# Altium PCB Final_1_Board.PcbDoc
Units mm, origin at the board's own origin, x right, y up, seen from the top; angles counter-clockwise.
Board outline 23.19 x 24.99 mm, 2 copper layers (Top Layer, Bottom Layer), stack 1.671 mm thick; 29 components, 55 nets, 125 pads, 50 vias.
Unrouted connection lines stored in the file: 1.
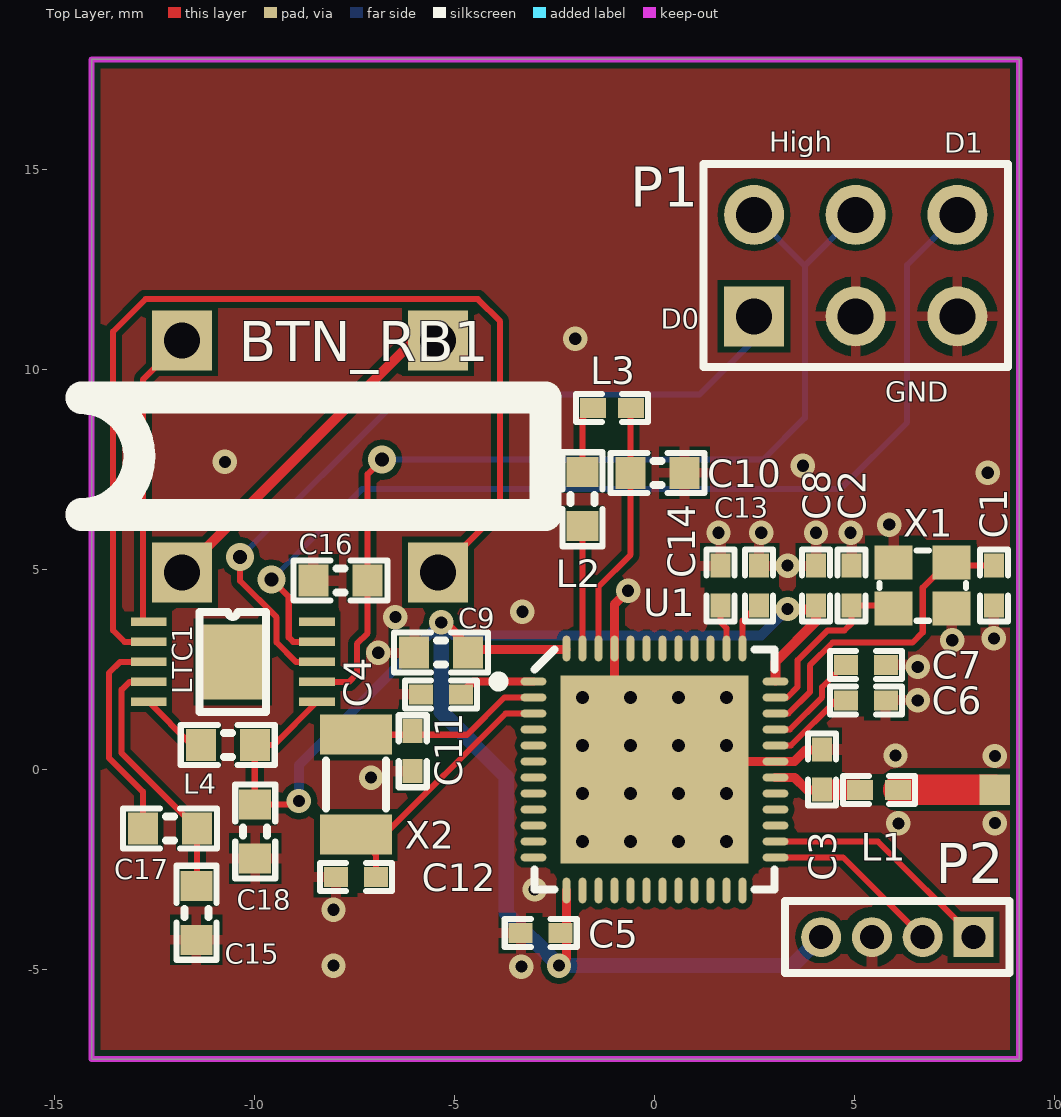
[diagram p0: Top Layer view]
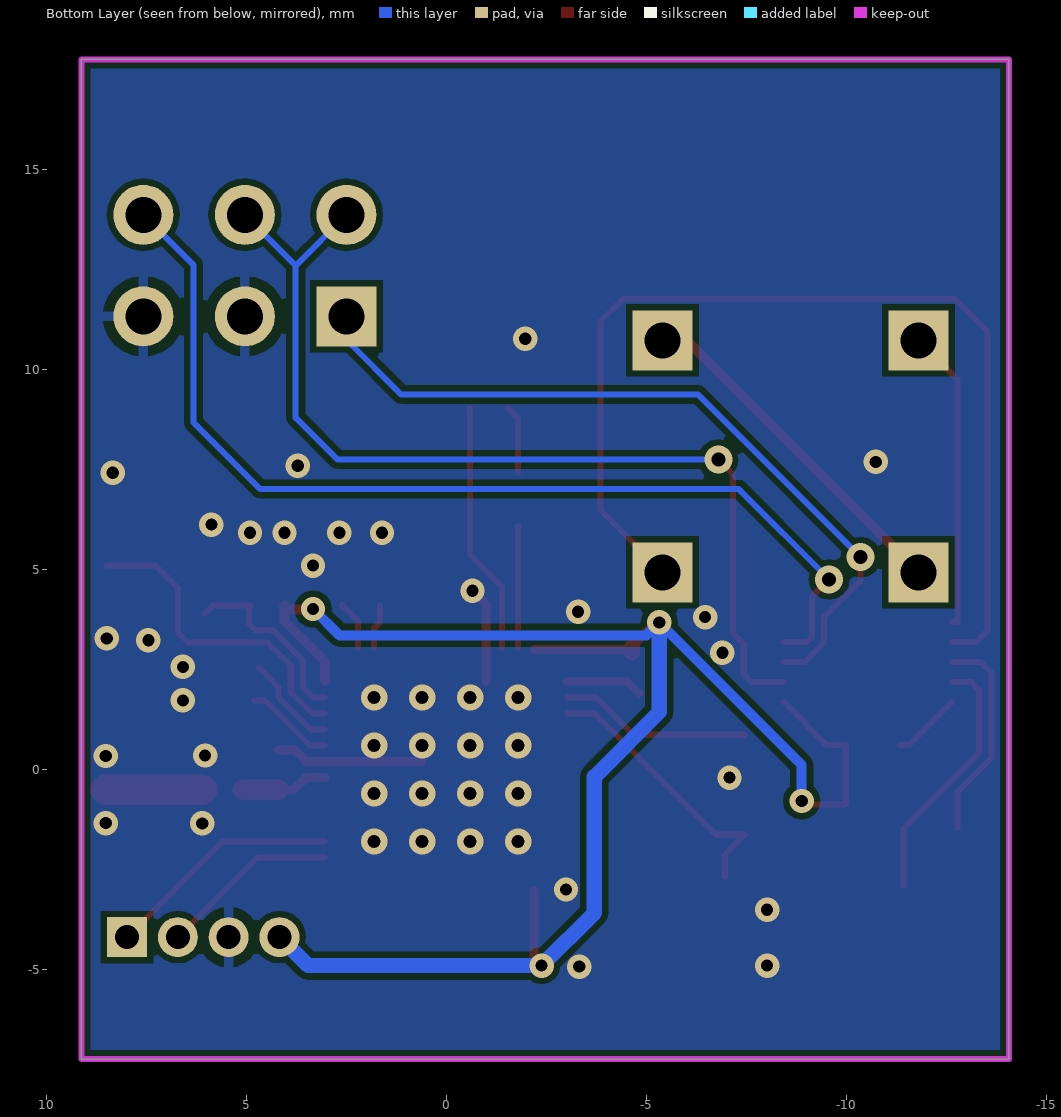
[diagram p1: Bottom Layer view, seen from below]
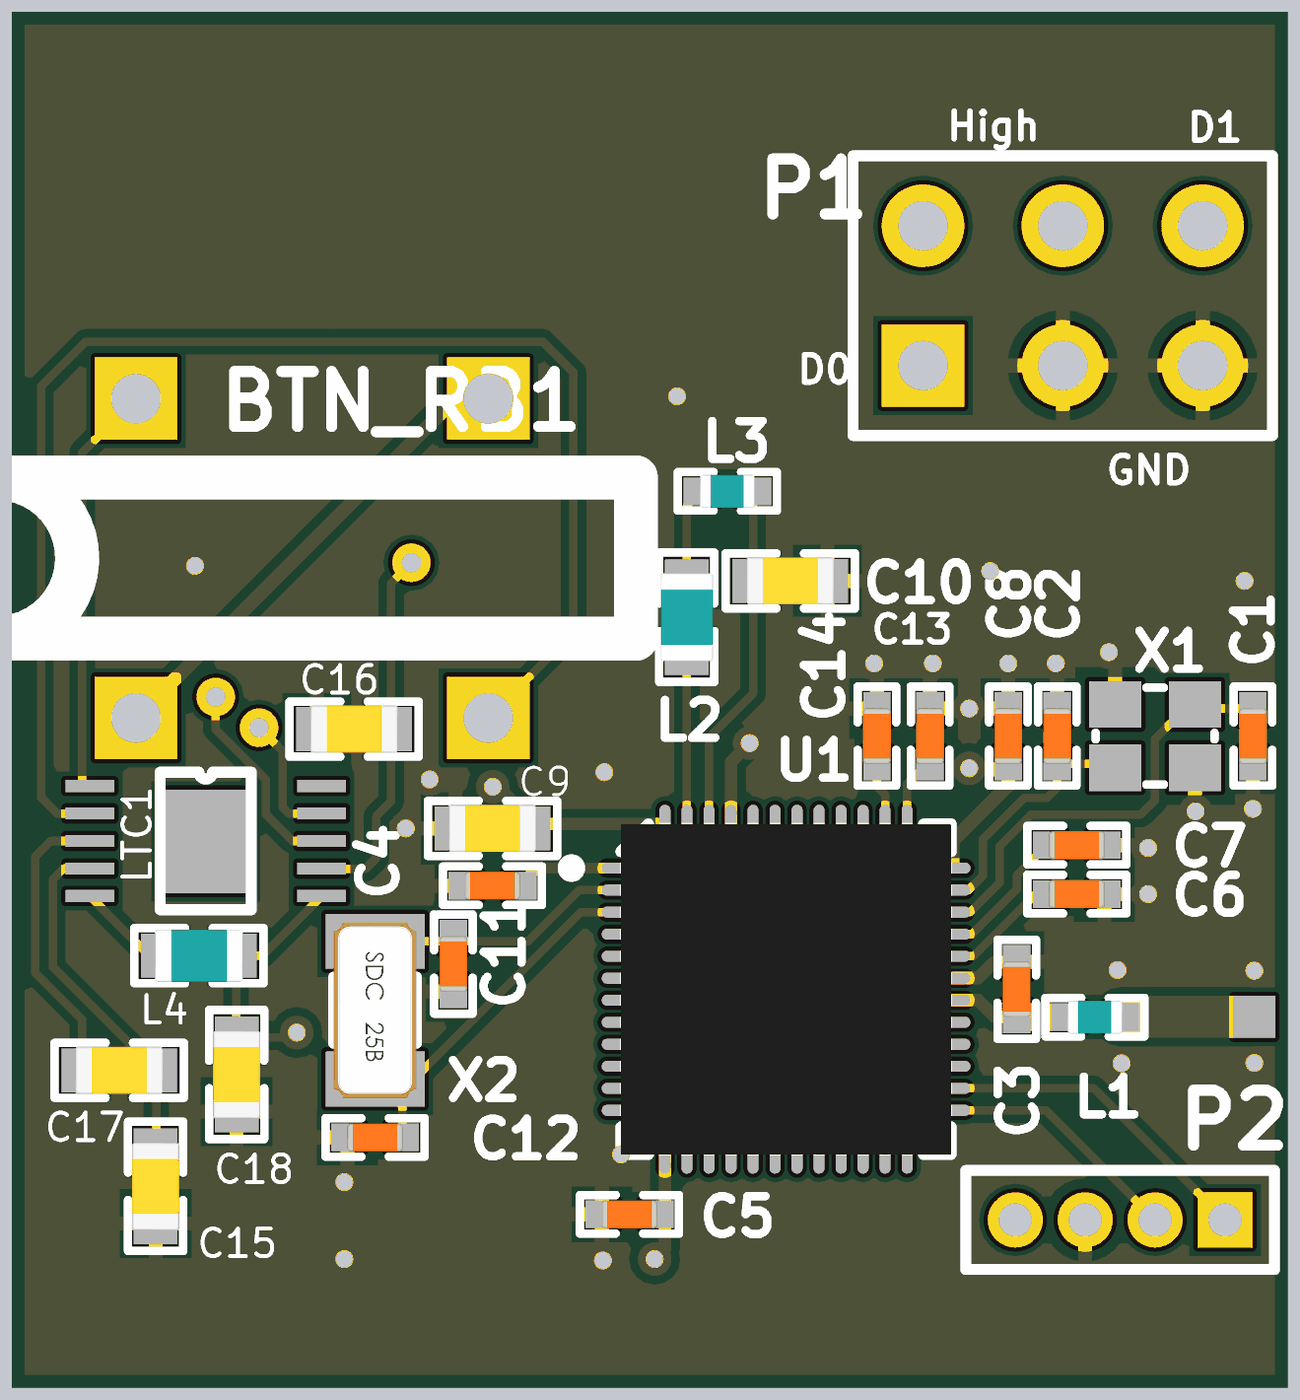
[diagram p2: 3D render of the assembled board from above, using the file's embedded part models]

## Layer stack, top to bottom
Top Solder: solder mask 0.0102, Solder Resist, Dk 3.5
Top Layer: signal copper 0.0356
Dielectric1: core 1.6002, FR-4, Dk 4.8
Bottom Layer: signal copper 0.0356
Bottom Solder: solder mask 0.0102, Solder Resist, Dk 3.5

## Board outline
-14.072,-7.239 -14.072,17.755 9.119,17.755 9.119,-7.239

## Design rules (kind name [scope] priority, off if disabled: settings)
Clearance Polygon_ANT [(InNamedPolygon('Top_Layer-GND')) or (InNamedPolygon('Bottom_Layer-GND')) vs InNet('RF')] p1: gap=0.127 ignorepadtopadclearanceinfootprint=FALSE except(0: Arc-Hole Track-Hole SMDPad-Hole THPad-Hole Via-Hole Fill-Hole Poly-Hole Region-Hole Text-Hole)
Clearance Polygon [(InNamedPolygon('Top_Layer-GND')) or (InNamedPolygon('Bottom_Layer-GND'))] p2: gap=0.254 ignorepadtopadclearanceinfootprint=FALSE except(0: Arc-Hole Track-Hole SMDPad-Hole THPad-Hole Via-Hole Fill-Hole Poly-Hole Region-Hole Text-Hole)
Clearance [All] p3: gap=0.152 ignorepadtopadclearanceinfootprint=FALSE except(0: Arc-Hole Track-Hole SMDPad-Hole THPad-Hole Via-Hole Fill-Hole Poly-Hole Region-Hole Text-Hole)
ComponentClearance [All] p1 off: gap=0.254 collisioncheckmode=3 verticalgap=0.254 showdistances=FALSE
FabricationTestPointUsage TestPointUsage [All] p1: valid=0 allowmultiple=FALSE
FabricationTestpoint Testpoint [All] p1: side=3 testpointundercomponent=TRUE minsize=1.016 maxsize=2.54 preferedsize=1.524 minholesize=0 maxholesize=1.016 preferedholesize=0.813 testpointgrid=0.025 allowsidetop=TRUE allowsidebottom=TRUE usegrid=TRUE gridtolerance=0
Height [All] p1 off: minheight=0 maxheight=25.4 prefheight=12.7
HoleSize [All] p1: absolutevalues=TRUE maxlimit=4.064 minlimit=0.305 maxpercent=80.000 minpercent=20.000
MinimumAnnularRing [All] p1 off: minimumring=0.152
PolygonConnect PolygonConnect_1 [isVia and innet(gnd)] p1: connectstyle=Direct reliefconductorwidth=0.254 reliefentries=4 polygonreliefangle="90 Angle" airgapwidth=0.254
PolygonConnect [All] p2: connectstyle=Relief reliefconductorwidth=0.254 reliefentries=4 polygonreliefangle="90 Angle" airgapwidth=0.254
RoutingVias [All] p1: holewidth=0.406 width=0.813 viastyle="Through Hole" minholewidth=0.254 minwidth=0.254 maxholewidth=0.711 maxwidth=1.27
SilkToSolderMaskClearance SilkscreenOverComponentPads [IsPad] p1: minsilkscreentomaskgap=0.254 clearancetoexposedcopper=TRUE
SolderMaskExpansion [All] p1: expansion=0.076
Width [All] p1: maxlimit=2.54 minlimit=0.152 preferedwidth=0.152
24 further rules are at their usual default settings.

## Components (designator, comment, footprint, x,y, rotation, side; value= is the part's Value field where it differs from the comment)
BTN_RB1 "ZF_button" ZF-button -11.811,10.728 r0 top
C1 "12pF" CAPC1005X04L 8.483,4.598 r270 top
C2 "12pF" CAPC1005X04L 4.927,4.598 r90 top
C3 "0.8pF" CAPC1005X04L 4.191,0 r270 top
C4 "100nF" CAPC1005X04L -5.334,1.88 r180 top
C5 "100nF" CAPC1005X04L -2.845,-4.089 r180 top
C6 "N.C." CAPC1005X04L 5.283,1.727 r180 top
C7 "100pF" CAPC1005X04L 5.283,2.616 r0 top
C8 "100nF" CAPC1005X04L 4.038,4.598 r90 top
C9 "4.7µF" CAPC1608X06L -5.334,2.921 r180 top
C10 "1.0µF" CAPC1608X06L 0.076,7.417 r180 top
C11 "12pF" CAPC1005X04L -6.045,0.457 r270 top
C12 "12pF" CAPC1005X04L -7.468,-2.692 r180 top
C13 "12pF" CAPC1005X04L 2.616,4.598 r90 top
C14 "12pF" CAPC1005X04L 1.651,4.598 r90 top
C15 "10µF" CAPC1608X06L -11.455,-3.581 r90 top
C16 "4.7µF" CAPC1608X06L -7.849,4.724 r0 top
C17 "1µF" CAPC1608X06L -12.116,-1.473 r0 top
C18 "47µF" CAPC1608X06L -9.982,-1.549 r90 top
L1 "3.9nH" INDC1005X04L 5.613,-0.508 r0 top
L2 "10µH" INDC1608X06L -1.803,6.756 r270 top
L3 "15nH" INDC1005X04L -1.067,9.042 r180 top
L4 "10µH" INDC1608X06L -10.668,0.61 r0 top
LTC1 "2x5 Pin" "MSOP10 - duplicate1" -12.649,3.692 r0 top
P1 "Header 3X2" HDR2X3 2.489,11.328 r0 top
P2 "MHDR1X4" MHDR1X4 7.976,-4.191 r180 top
U1 "nRF52832-QFAA" QFN40P600X600X90-48N 0,0 r0 top locked
X1 "32MHz" BT-XTAL_2016 6.705,4.598 r180 top
X2 "32.768kHz" XTAL_3215 -7.468,-0.381 r270 top

## Footprints (in the part's own frame and the unit in brackets; to place one, negate y for a bottom-side part, rotate by r counter-clockwise, add the part's x,y. Pads: shape width x height; smd on the part's side, far side on the other; paste and mask are expansions set on the pad)
BT-XTAL_2016 [mm] "Crystal 2.0 x 1.6 mm"
  rect 0.95x0.85 smd: 1(-0.725,-0.575) 2(0.725,-0.575) 3(0.725,0.575) 4(-0.725,0.575)
  silkscreen extent -1.08,-0.88 1.08,0.88
CAPC1005X04L [mm] "Chip Capacitor, 2-Leads, Body 1.0x0.5mm, IPC High Density"
  rect 0.6x0.5 smd: 1(-0.5,0) 2(0.5,0)
  silkscreen extent -0.9,-0.35 0.9,0.35, body extent -0.51,-0.25 0.51,0.25, height 0.5
CAPC1608X06L [mm] "Chip Capacitor, 2-Leads, Body 1.6x0.8mm, IPC High Density"
  rect 0.75x0.8 smd: 1(-0.675,0) 2(0.675,0)
  silkscreen extent -1.17,-0.5 1.17,0.5, body extent -0.8,-0.43 0.8,0.43, height 0.8
HDR2X3 [mm] "Connector; Header; 3x2 Position"
  rect 1.5x1.5 hole 0.9: 1(0,0)
  round 1.5 hole 0.9: 2(0,2.54) 3(2.54,0) 4(2.54,2.54) 5(5.08,0) 6(5.08,2.54)
  silkscreen extent -1.27,-1.27 6.35,3.81
INDC1005X04L [mm] "Chip Inductor, 2-Leads, Body 1.0x0.5mm, IPC High Density"
  rect 0.65x0.5 smd: 1(-0.475,0) 2(0.475,0)
  silkscreen extent -0.9,-0.35 0.9,0.35, body extent -0.5,-0.3 0.5,0.3, height 0.5
INDC1608X06L [mm] "Chip Inductor, 2-Leads, Body 1.6x0.8mm, IPC High Density"
  rect 0.75x0.8 smd: 1(-0.675,0) 2(0.675,0)
  silkscreen extent -1.18,-0.5 1.17,0.5, body extent -0.8,-0.48 0.8,0.48, height 0.8
MHDR1X4 [mm] "Connector; Header; 4 Position"
  rect 1x1 hole 0.6: 1(0,0)
  round 1 hole 0.6: 2(1.27,0) 3(2.54,0) 4(3.81,0)
  silkscreen extent -0.9,-0.9 4.71,0.9
"MSOP10 - duplicate1" [mm]
  rect 0.889x0.22 smd: 1(0,0) 2(0,-0.5) 3(0,-1) 4(0,-1.5) 5(0,-2) 6(4.211,-2) 7(4.211,-1.5) 8(4.211,-1) 9(4.211,-0.5) 10(4.211,0)
  rect 1.68x1.88 smd: 11(2.105,-1.006)
  silkscreen extent 1.28,-2.25 2.93,0.25
QFN40P600X600X90-48N [mm] "QFN, 48-Leads, Body 6,0x6,0mm (max), Pitch 0,40mm, IPC Medium Density"
  oval 0.65x0.2 smd: 1(-3.025,2.2) 2(-3.025,1.8) 3(-3.025,1.4) 4(-3.025,1) 5(-3.025,0.6) 6(-3.025,0.2) 7(-3.025,-0.2) 8(-3.025,-0.6) 9(-3.025,-1) 10(-3.025,-1.4) 11(-3.025,-1.8) 12(-3.025,-2.2) 25(3.025,-2.2) 26(3.025,-1.8) 27(3.025,-1.4) 28(3.025,-1) 29(3.025,-0.6) 30(3.025,-0.2) 31(3.025,0.2) 32(3.025,0.6) 33(3.025,1) 34(3.025,1.4) 35(3.025,1.8) 36(3.025,2.2)
  oval 0.2x0.65 smd: 13(-2.2,-3.025) 14(-1.8,-3.025) 15(-1.4,-3.025) 16(-1,-3.025) 17(-0.6,-3.025) 18(-0.2,-3.025) 19(0.2,-3.025) 20(0.6,-3.025) 21(1,-3.025) 22(1.4,-3.025) 23(1.8,-3.025) 24(2.2,-3.025) 37(2.2,3.025) 38(1.8,3.025) 39(1.4,3.025) 40(1,3.025) 41(0.6,3.025) 42(0.2,3.025) 43(-0.2,3.025) 44(-0.6,3.025) 45(-1,3.025) 46(-1.4,3.025) 47(-1.8,3.025) 48(-2.2,3.025)
  rect 4.7x4.7 smd: 49(0,0)
  silkscreen extent -4.02,-3 3,3, body extent -3.02,-3.02 3.02,3.02, height 0.86
XTAL_3215 [mm] "XTAL SMD 3.2 x 1.5 mm"
  rect 1x1.8 smd: 1(-1.25,0) 2(1.25,0)
  silkscreen extent -0.6,-0.75 0.6,0.75, body extent -1.6,-0.75 1.6,0.75, height 0.81
ZF-button [mm]
  rect 1.5x1.5 hole 0.9: 1(0,0) 2(0,-5.8) 3(6.4,-5.8) 4(6.4,0)
  silkscreen extent -2.52,-4.36 9.08,-1.43

## Part data
C1 C2 C11 C12 C13 C14: library part C0402-12p, "Capacitor, NP0, ±2%", Artikkelnr Noca=20029159, Artikkelnr Simpro=N.A., Footprint Doc=0402, LatestRevisionDate=2011-05-11, Note=50V, Part Number=C0402-12p, Pin Count=2, Published=2009-05-08, Publisher="Nordic Semiconductor"
C3: library part C0402-0.8p, "Capacitor, NP0, ±5%", Artikkelnr Noca=20029147, Artikkelnr Simpro=N.A., Footprint Doc=0402, LatestRevisionDate=2012-11-21, Note=50V, Part Number=C0402-0.8p, Pin Count=2, Published=2009-05-08, Publisher="Nordic Semiconductor"
C4 C5 C8: library part C0402-100n, "Capacitor, X7R, ±10%", Artikkelnr Noca=20039200, Artikkelnr Simpro=N.A., Footprint Doc=0402, LatestRevisionDate=2009-11-23, Note=16V, Part Number=C0402-100n, Pin Count=2, Published=2009-05-08, Publisher="Nordic Semiconductor"
C6: library part C0402-N.C., "Not mounted", Artikkelnr Noca=N.A., Artikkelnr Simpro=N.A., Footprint Doc=0402, LatestRevisionDate=2009-05-08, Note="Chip Cap", Part Number=C0402-N.C., Pin Count=2, Published=2009-05-08, Publisher="Nordic Semiconductor"
C7: library part C0402-100p, "Capacitor, NP0, ±5%", Artikkelnr Noca=20029135, Artikkelnr Simpro=N.A., Footprint Doc=0402, LatestRevisionDate=2009-05-08, Note=50V, Part Number=C0402-100p, Pin Count=2, Published=2009-05-08, Publisher="Nordic Semiconductor"
C9: library part C0603-4µ7, "Capacitor, X5R, ±10%", Artikkelnr Noca=20069060, Artikkelnr Simpro=N.A., Footprint Doc=0603, LatestRevisionDate=2009-11-23, Note=6.3V, Part Number=C0603-4µ7, Pin Count=2, Published=2009-05-08, Publisher="Nordic Semiconductor"
C10: library part C0603-1µ0, "Capacitor, X7R, ±10%", Artikkelnr Noca=20039335, Artikkelnr Simpro=N.A., Footprint Doc=0603, LatestRevisionDate=2013-06-05, Note=16V, Part Number=C0603-1µ0, Pin Count=2, Published=2009-05-08, Publisher="Nordic Semiconductor"
C15 C16 C17 C18: "Capacitor, X5R, ±10%", Part Number=C0603-4µ7, Artikkelnr Noca=20069060, Artikkelnr Simpro=N.A., Footprint Doc=0603, LatestRevisionDate=2009-11-23, Note=6.3V, Pin Count=2, Published=2009-05-08, Publisher="Nordic Semiconductor"
L1: library part L0402-3n9, "High frequency chip inductor ±5%", Manufacturer=Murata, Manufacturer Part Number=LQP15MN3N9B02D, Supplier part number=490-1131-1-ND, Artikkelnr Noca=33029151, Artikkelnr Simpro=N.A., Datasheet=http://search.murata.co.jp/Ceramy/image/img/PDF/ENG/L0075S0084LQP15M.pdf, Footprint Doc=0402, LatestRevisionDate=2012-09-19, Note="High frequency chip inductor ±5%", Part Number=L0402-3n9, Pin Count=2, Published=2009-05-08, Publisher="Nordic Semiconductor", Supplier=Digi-Key
L2: library part L0603-10µ, "Chip inductor, IDC,min = 50 mA, ±20%", 2nd source part number=178-6105, Manufacturer="Taiyo Yuden", Manufacturer Part Number=LBMF1608T100K, Supplier part number=587-1714-1-ND, 2nd source Supplier=Farnell, Artikkelnr Noca=33029314, Artikkelnr Simpro=N.A., Datasheet=http://www.yuden.co.jp/ut/product/pdf/elb2_e.pdf, Footprint Doc=0603, LatestRevisionDate=2012-09-19, Note="LBMF1608T100K 10µH 80mA 0603", Part Number=L0603-10µ, Pin Count=2, Published=2010-02-24, Publisher="Nordic Semiconductor", Supplier=Digi-Key
L3: library part L0402-15n, "High frequency chip inductor ±10%", 2nd source part number=658-1328, Manufacturer="Taiyo Yuden", Manufacturer Part Number=HK100515NJ-T, Supplier part number=587-1521-1-ND, 2nd source Supplier=Farnell, Artikkelnr Noca=33029323, Artikkelnr Simpro=N.A., Datasheet=http://www.yuden.co.jp/productdata/catalog/en/mlci04_e.pdf, Footprint Doc=0402, LatestRevisionDate=2012-09-19, Note="High frequency chip inductor ±10%", Part Number=L0402-15n, Pin Count=2, Published=2010-07-12, Publisher="Nordic Semiconductor", Supplier=Digi-Key
L4: "Chip inductor, IDC,min = 50 mA, ±20%", 2nd source part number=178-6105, Manufacturer="Taiyo Yuden", Manufacturer Part Number=LBMF1608T100K, Part Number=L0603-10µ, Supplier part number=587-1714-1-ND, 2nd source Supplier=Farnell, Artikkelnr Noca=33029314, Artikkelnr Simpro=N.A., Datasheet=http://www.yuden.co.jp/ut/product/pdf/elb2_e.pdf, Footprint Doc=0603, LatestRevisionDate=2012-09-19, Note="LBMF1608T100K 10µH 80mA 0603", Pin Count=2, Published=2010-02-24, Publisher="Nordic Semiconductor", Supplier=Digi-Key
P1: "Header, 3-Pin, Dual row", LatestRevisionDate=17-Jul-2002, LatestRevisionNote="Re-released for DXP Platform.", Publisher="Altium Limited"
P2: "Header, 4-Pin", LatestRevisionDate=17-Jul-2002, LatestRevisionNote="Re-released for DXP Platform.", Publisher="Altium Limited"
U1: "Multi-protocol Bluetooth Low Energy, ANT and 2.4GHz proprietary system-on-chip", Manufacturer="Nordic Semiconductor", Artikkelnr Noca=N.A., Artikkelnr Simpro=N.A., Footprint Doc=QFN-48, LatestRevisionDate=2014-11-26, Manufacturer Part Number=nRF52832-QFAA, Part Number=nRF52832-QFAA, Pin Count=48, Published=2014-11-26, Publisher="Nordic Semiconductor", Supplier="Nordic Semiconductor"
X1: library part XTAL_SMD2016_32MHz_8pF_General, "XTAL SMD 2016, 32MHz, Cl=8pF, Total Tol: ±40ppm", Artikkelnr Noca=N.A., Artikkelnr Simpro=N.A., Footprint Doc=XTAL_2016, LatestRevisionDate=2016-08-19, Note="XTAL SMD 32.000MHz", Part Number=XTAL_SMD2016_32MHz_8pF_General, Pin Count=4, Published=2016-08-19, Publisher="Nordic Semiconductor"
X2: library part XTAL_SMD3215_32.768kHz_9pF_General, "XTAL SMD 3215, 32.768kHz, Cl=9pF, Total Tol: ±50ppm", Artikkelnr Noca=N.A., Artikkelnr Simpro=N.A., Footprint Doc=XTAL_3215, LatestRevisionDate=2016-08-19, Note="XTAL SMD 32.768kHz", Part Number=XTAL_SMD3215_32.768kHz_9pF_General, Pin Count=2, Published=2016-08-19, Publisher="Nordic Semiconductor"

## Free pads (board coordinates)
  rect 0.762x0.762 smd: 0(8.509,-0.502)

## Via types
v1: diameter 0.61, hole 0.305, Top Layer to Bottom Layer, tented both sides, 31 vias
v2: diameter 0.66, hole 0.33, Top Layer to Bottom Layer, tented both sides, 16 vias
v3: diameter 0.7, hole 0.35, Top Layer to Bottom Layer, 3 vias

## Nets (pads, with @x,y where several pads share a name; then routed paths per layer and width w, separated by ;. In a path a pad name is that pad's centre, name@x,y a point inside that pad or via, vN(x,y) a via of type N, cw(c..) or ccw(c..) an arc to the next point about the centre after c; other vN are vias at no path point)
DEC1: C4.1 U1.1 | length 1.9
  Top Layer w0.203: C4.1@-4.83,1.899 -4.529,2.2 U1.1
DEC2: C6.2 U1.32 | length 2.2
  Top Layer w0.152: U1.32 3.411,0.6 4.538,1.727 C6.2@4.801,1.727
DEC3: C7.1 U1.33 | length 2.4
  Top Layer w0.152: U1.33 3.38,1 4.191,1.811 4.191,2.062 C7.1@4.675,2.546
DEC4: C10.2 L3.1 U1.46 | length 6.4
  Top Layer w0.152: U1.46 -1.4,4.569 -0.599,5.37 C10.2 -0.599,9.035 L3.1
GND: C1.2 C2.2 C3.1 C4.2 C5.2 C6.1 C7.2 C8.2 C9.2 C10.1 C11.2 C12.2 C13.2 C14.2 C15.1 C16.1 C18.1 P1.3 P1.5 P2.3 U1.31 U1.45 U1.49 X1.2 X1.4 | length 6.1
  Top Layer w0.229: U1.49@-1,2.2 U1.45 -1,4.131 v1(-0.66,4.47) ; U1.49@0.618,0.203 3.499,0.203 3.786,0.49 C3.1@4.199,0.49
  other v1: -3.327,-4.928 -8.026,-4.902 -8.026,-3.505 -2.997,-3 6.096,-1.346 8.509,-1.34 -7.087,-0.203 8.509,0.337 6.024,0.35 6.579,1.727 6.579,2.565 -6.909,2.921 7.442,3.231 8.483,3.277 -6.477,3.81 -3.302,3.942 3.327,5.098 1.6,5.918 2.667,5.918 4.039,5.918 4.902,5.918 5.867,6.122 8.331,7.417 3.708,7.595 -10.74,7.69 -1.981,10.77
  other v2: -1.8,-1.8 -0.6,-1.8 0.6,-1.8 1.8,-1.8 -1.8,-0.6 -0.6,-0.6 0.6,-0.6 1.8,-0.6 -1.8,0.6 -0.6,0.6 0.6,0.6 1.8,0.6 -1.8,1.8 -0.6,1.8 0.6,1.8 1.8,1.8
NetBTN_RB1_1: BTN_RB1.1 LTC1.1 | length 7.6
  Top Layer w0.152: LTC1.1 -12.79,3.692 -12.79,9.749 BTN_RB1.1
NetBTN_RB1_2: BTN_RB1.2 BTN_RB1.4 | length 8.8
  Top Layer w0.254: BTN_RB1.2 -6.011,10.728 BTN_RB1.4
NetBTN_RB1_3: BTN_RB1.3 LTC1.2 | length 25.6
  Top Layer w0.152: LTC1.2 -13.251,3.192 -13.538,3.48 -13.538,10.947 -12.725,11.76 -4.42,11.76 -3.861,11.201 -3.861,6.478 BTN_RB1.3
NetC3_2: C3.2 L1.1 U1.30 | length 2.2
  Top Layer w0.229: U1.30 3.5,-0.2 3.81,-0.51 C3.2@4.199,-0.51
  Top Layer w0.508: C3.2@4.191,-0.505 L1.1@5.088,-0.505
NetC15_2: C15.2 C17.2 LTC1.4 | length 6.4
  Top Layer w0.152: LTC1.4 -13.124,2.192 -13.322,1.994 -13.322,0.408 C17.2 -11.441,-2.892 C15.2
NetC16_2: C16.2 LTC1.7 P1.2 P1.4 | length 25.3
  Top Layer w0.152: LTC1.7 -8.43,2.184 -7.645,2.184 -7.442,2.388 -7.442,3.142 -7.174,3.411 C16.2 -7.174,7.381 v3(-6.807,7.747)
  Bottom Layer w0.152: v3(-6.807,7.747) 2.712,7.747 3.759,8.794 3.759,12.598 ; P1.2 3.759,12.598 ; P1.4@5.029,13.64 P1.4 3.759,12.598
NetC17_1: C17.1 LTC1.3 | length 5.3
  Top Layer w0.152: C17.1 -12.791,-0.554 -13.64,0.295 -13.64,2.413 -13.36,2.692 LTC1.3
NetL2_1: L2.1 L3.2 | length 1.7
  Top Layer w0.152: L2.1 -1.803,8.781 L3.2
NetL2_2: L2.2 U1.47 | length 3.1
  Top Layer w0.152: L2.2 -1.803,3.028 U1.47
NetL4_1: L4.1 LTC1.5 | length 1.8
  Top Layer w0.152: LTC1.5 -11.566,0.61 L4.1
NetLTC1_8: LTC1.8 P1.1 | length 19.4
  Top Layer w0.152: v3(-10.363,5.309) -10.363,4.719 -9.449,3.805 -9.449,3.175 -8.966,2.692 LTC1.8
  Bottom Layer w0.152: v3(-10.363,5.309) -6.299,9.373 1.118,9.373 2.489,10.744 P1.1
NetLTC1_9: LTC1.9 P1.6 | length 25.6
  Top Layer w0.152: v3(-9.576,4.75) -9.144,4.318 -9.144,3.301 -9.035,3.192 LTC1.9
  Bottom Layer w0.152: v3(-9.576,4.75) -7.315,7.01 4.648,7.01 6.312,8.674 6.312,12.611 P1.6
P0.00/XL1: C11.1 U1.2 X2.1 | length 4.8
  Top Layer w0.152: X2.1 -4.683,0.869 -3.752,1.8 U1.2
P0.01/XL2: C12.1 U1.3 X2.2 | length 7
  Top Layer w0.152: C12.1 -6.968,-2.131 X2.2 -6.752,-1.631 -3.721,1.4 U1.3
P0.02/AIN0: U1.4
P0.03/AIN1: U1.5
P0.04/AIN2: U1.6
P0.05/AIN3: U1.7
P0.06: U1.8
P0.07: U1.9
P0.08: U1.10
P0.09: U1.11
P0.10: U1.12
P0.11: U1.14
P0.12: U1.15
P0.13: U1.16
P0.14: U1.17
P0.15: U1.18
P0.16: U1.19
P0.17: U1.20
P0.18: U1.21
P0.19: U1.22
P0.20: U1.23
P0.21: U1.24
P0.22: U1.27
P0.23: U1.28
P0.24: U1.29
P0.25: C13.1 U1.37 | length 1.3
  Top Layer w0.152: U1.37 2.2,3.724 2.595,4.119 C13.1
P0.26: C14.1 U1.38 | length 1.1
  Top Layer w0.152: C14.1 1.651,3.683 1.8,3.534 U1.38
P0.27: U1.39
P0.28/AIN4: U1.40
P0.29/AIN5: U1.41
P0.30/AIN6: U1.42
P0.31/AIN7: U1.43
RF: L1.2 pad.0 | length 2.4
  Top Layer w0.762: L1.2@6.096,-0.502 pad.0
SWDCLK: P2.2 U1.25 | length 4.5
  Top Layer w0.152: U1.25 4.715,-2.2 P2.2
SWDIO: P2.1 U1.26 | length 5.9
  Top Layer w0.152: U1.26 5.585,-1.8 P2.1
VDD_NRF: C5.1 C8.1 C9.1 C18.2 L4.2 LTC1.6 P2.4 U1.13 U1.36 U1.48 | length 44.8
  Top Layer w0.152: v1(-8.89,-0.787) -8.977,-0.874 C18.2 -9.993,-0.864 L4.2 -9.521,0.61 LTC1.6
  Top Layer w0.229: v1(-5.33,3.677) -5.247,3.677 -4.655,3.085 -4.57,3 U1.48@-2.21,3 ; v1(-2.388,-4.902) -2.2,-4.715 U1.13
  Top Layer w0.254: U1.36@3.023,2.227 3.023,2.688 4.038,3.704 C8.1 ; v1(3.327,4.013) 3.345,3.996 C8.1@4.038,3.996
  Top Layer w0.381: C9.1@-4.655,2.915 C9.1@-4.655,3.085
  Bottom Layer w0.254: v1(-8.89,-0.787) -8.89,0.114 -5.33,3.674 v1(-5.33,3.677) -5.006,3.353 2.667,3.353 v1(3.327,4.013)
  Bottom Layer w0.381: v1@-5.33,3.674 -5.33,1.439 -3.707,-0.184 -3.707,-3.583 v1(-2.388,-4.902) 3.454,-4.902 P2.4
XC1: C1.1 U1.34 X1.1 | length 8
  Top Layer w0.152: U1.34 3.349,1.4 3.883,1.934 3.883,2.603 4.456,3.175 6.451,3.175 6.705,3.429 6.705,4.547 7.256,5.098 C1.1
XC2: C2.1 U1.35 X1.3 | length 4.7
  Top Layer w0.152: U1.35 3.315,1.8 3.579,2.064 3.579,2.733 4.326,3.48 4.75,3.48 4.927,3.657 C2.1@4.927,4.09 ; C2.1@4.877,4.098 5.833,4.098 X1.3@6.033,3.898
pads on no net: LTC1.10 LTC1.11 U1.44

## Polygon pours and split planes (outlines as drawn)
GND on Top Layer "GND" (solid, pour order 6): -14.072,17.755 -14.072,-7.239 9.093,-7.239 9.119,-7.214 9.093,-7.188 9.093,17.755
GND on Bottom Layer "GND" (solid, pour order 8): -14.072,17.755 9.093,17.755 9.093,-7.239 -14.072,-7.239

## Keep-outs
Keep-Out Layer:
  lines w0.152: -14.072,-7.239 -14.072,15.443 -14.072,17.755 9.119,17.755 9.119,15.443 9.119,-7.239 -14.072,-7.239

## Dimensions
9.627,17.78 to 9.677,-7.214 on Mechanical 3
-14.072,-7.976 to 9.119,-7.595 on Mechanical 3

## Text inside footprints (layer, text, board x,y; h text height)
P1: Top Overlay "D0" at 0.152,11.024 h0.5; Top Overlay "High" at 2.87,15.443 h0.5; Top Overlay "GND" at 5.766,9.195 h0.5; Top Overlay "D1" at 7.239,15.418 h0.5